# Altium PCB MB1364.PcbDoc (part 2 of 3)
Units mm, origin at the board's own origin, x right, y up, seen from the top; angles counter-clockwise.
Board outline 70 x 133.34 mm, 4 copper layers (Top Layer, Signal Layer 1, Signal Layer 3, Bottom Layer), stack 1.501 mm thick; 93 components, 195 nets, 473 pads, 282 vias.
Unrouted connection lines stored in the file: 23.
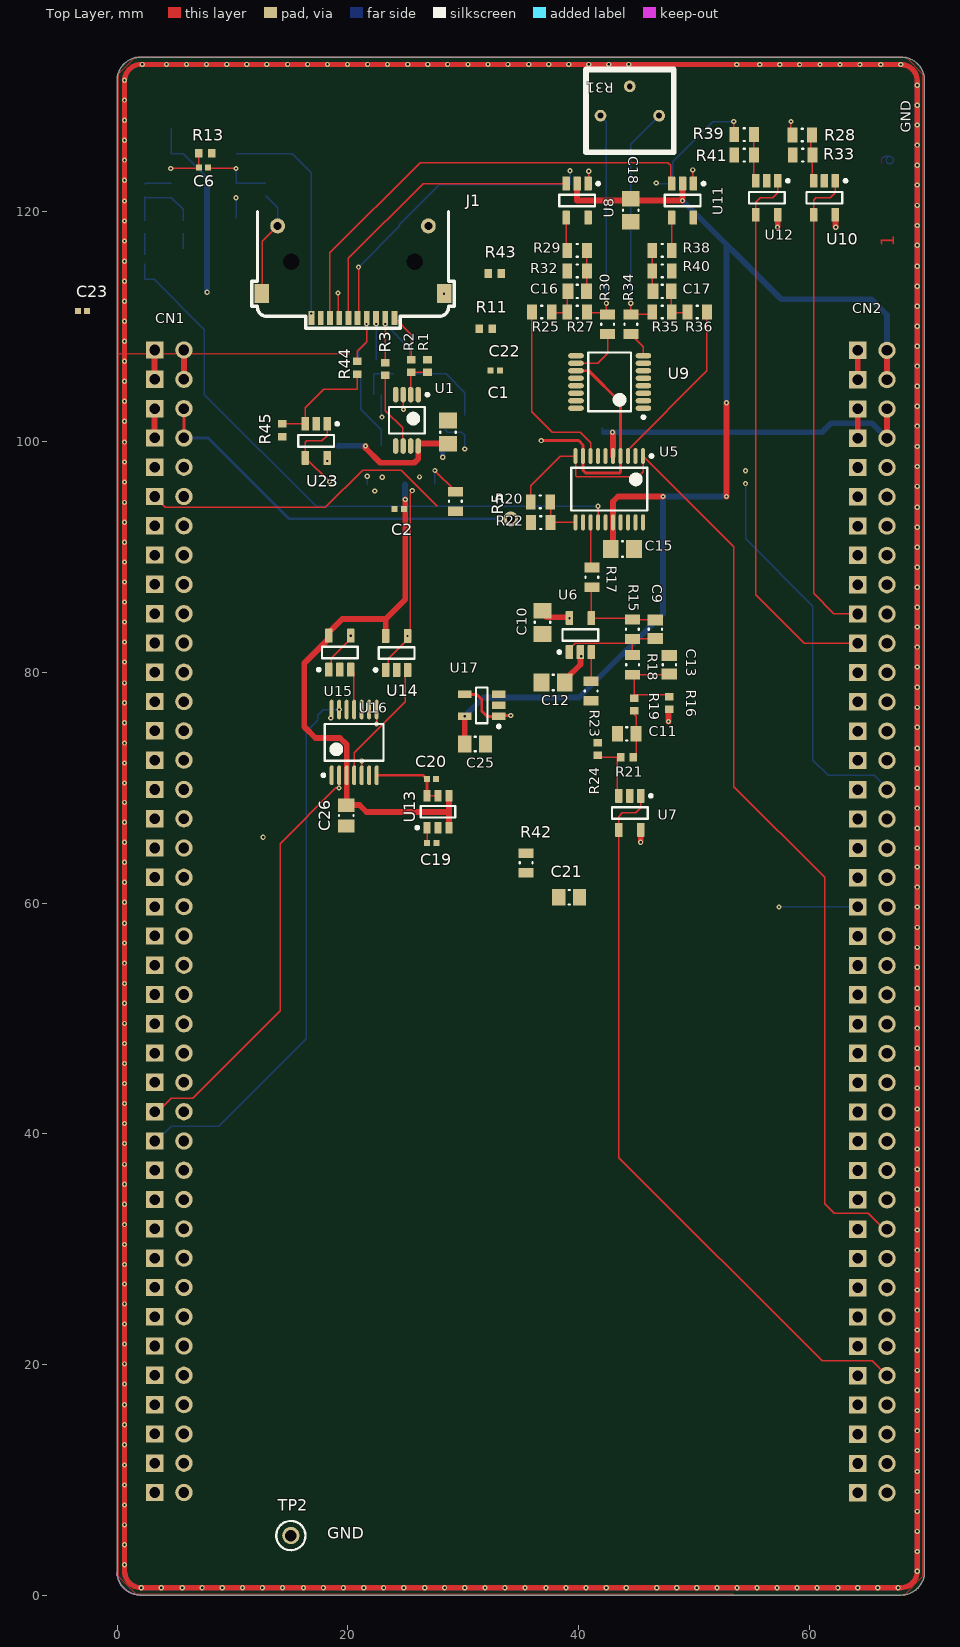
[diagram p0: Top Layer view]

## Part data (continued)
U2 U5: "IC SWITCH QUAD SPDT 20TSSOP", Case/Package=TSSOP, Dual Supply Voltage=15V, Manufacturer=Maxim, Manufacturer Part Number=MAX333AEUP+, Max Dual Supply Voltage=20V, Max Operating Temperature=85°C, Max Power Dissipation=559mW, Max Supply Current=250uA, Max Supply Voltage=30V, Min Dual Supply Voltage=4.5V, Min Operating Temperature=-40°C, Min Supply Voltage=10V, On-State Resistance=35R, Operating Supply Current=1uA, Package Quantity=74, Supplier Part Number 1=700-MAX333AEUP, ComponentLink1Description=https://datasheet.ciiva.com/2978/max333a-2978850.pdf, ComponentLink1URL=https://datasheet.ciiva.com/2978/max333a-2978850.pdf, ComponentLink2Description=https://datasheet.ciiva.com/30478/0900766b81253c85-30478260.pdf, ComponentLink2URL=https://datasheet.ciiva.com/30478/0900766b81253c85-30478260.pdf, ComponentLink3Description=https://datasheet.ciiva.com/1674/max333a-1674617.pdf, ComponentLink3URL=https://datasheet.ciiva.com/1674/max333a-1674617.pdf, ComponentLink4Description=https://datasheet.ciiva.com/26825/max333aeup-26825546.pdf, ComponentLink4URL=https://datasheet.ciiva.com/26825/max333aeup-26825546.pdf, Height=0.95mm, Lead Free="Lead Free", Length=6.6mm, Number of Bits=4, Number of Channels=4, Number of Pins=20, Packaging=Rail/Tube, Pricing 1="1=6.77, 10=6.43, 50=5.8, 100=5.8, 1000=5.62, 10000=5.62 (USD)", Radiation Hardening=No, REACH SVHC=Unknown, Stock 1=664, Supplier 1=Mouser, Supply Type=Single,Dual, Throw Configuration=SPDT, Turn-Off Delay Time=145ns, Turn-On Delay Time=175ns, Weight=0.006737oz, Width=4.5mm
U4: library part CMP-0055-00893-3, "CMOS Dual Operational Amplifier, 8-pin Narrow SOIC", Manufacturer="Texas Instruments", Package Reference=D0008A, PackageTopMarking=NSZXTT*LMC66*2CM, PowerWise=N, Code_IPC=SOIC127P600-8, Code_JEDEC=MS-012-AA, ComponentLink1Description="Datasheet URL", ComponentLink1URL=http://www.ti.com/general/docs/lit/getliterature.tsp?genericPartNumber=LMC662&fileType=pdf, CompType=Amplifiers, PackageDescription="SOIC Narrow, 4.9 x 3.9 x 1.45mm, 8 Lead, 1.27mm Pitch", PartId=1, PinCount=8, RoHS=N
U6 U7 U8 U10 U11 U12 U14 U15 U17 U22 U23: library part CMP-0809-00005-2, "Precision, Low Noise, Rail-to-Rail Output, Zero-Drift Operational Amplifier, 4 to 36 V, -40 to 125 degC, 5-pin SOT23 (DBV5), Green (RoHS & no Sb/Br)", Manufacturer="Texas Instruments", Rating=Catalog, Total Supply Voltage(Max)(+5V is 5, +/-5V is 10)=36, Total Supply Voltage(Min)(+5V is 5, +/-5V is 10)=4, CMRR(Min)(dB)=120, Code_JEDEC=MO-178, ComponentLink1Description="Manufacturer URL", ComponentLink1URL=http://www.ti.com/, ComponentLink2Description=Datasheet, ComponentLink2URL=http://www.ti.com/lit/ds/symlink/opa188.pdf, ComponentLink3Description="Package Specification", ComponentLink3URL=http://www.ti.com/litv/pdf/mpds018i, DatasheetVersion=SBOS642A, Eco-Plan="Green (RoHS & no Sb/Br)", GBW(Typ)(MHz)=2, Iq per channel(Max)(mA)=0.51, Mounting Technology="Surface Mount", Number of Channels=1, Offset Drift(Typ)(uV/C)=0.03, PackageDescription="5-Pin Plastic Small Outline, Body 1.6 x 2.9 mm, Pitch 0.95 mm", PackageReference=DBV0005A, PackageVersion="4073253-4/K, 03/2006", PartNumber=OPA188AIDBVR, Slew Rate(Typ)(V/us)=0.8, SubFamily="Zero Drift Precision Amplifier"
U13: "IC VREF SERIES 4.096V SOT23", Current - Supply=350µA, Manufacturer="Maxim Integrated", Operating Temperature="-40°C ~ 125°C (TA)", Package / Case=SOT-23-6, Supplier Part Number 1=MAX6070AAUT41+TCT-ND, Temperature Coefficient=6ppm/°C, Tolerance=±0.04%, Voltage - Input="4.3 V ~ 5.5 V", Voltage - Output (Min/Fixed)=4.096V, Category="Integrated Circuits (ICs)", ComponentLink1Description=https://datasheets.maximintegrated.com/en/ds/MAX6070-MAX6071.pdf, ComponentLink1URL=https://datasheets.maximintegrated.com/en/ds/MAX6070-MAX6071.pdf, Manufacturer Part Number=MAX6070AAUT41+T, Mounting Type="Surface Mount", Noise - 0.1Hz to 10Hz=9.6µVp-p, Noise - 10Hz to 10kHz=9µVrms, Output Type=Fixed, Packaging="Cut Tape (CT)", Part Status=Active, Pricing 1="1=3.41, 10=3.213, 25=2.5704, 50=2.4418, 100=2.2491, 250=2.13344, 500=2.05634 (USD)", Reference Type=Series, RoHS="RoHS Compliant", Stock 1=2623, Supplier 1=Digi-Key, Supplier Device Package=SOT-23-6
U16: library part CMP-0318-01541-2, "Quad 16-Bit Digital-to-Analog Converter with 5 ppm/degC On-Chip Reference, -40 to +105 degC, RU-14, Pb-Free, Tube", Generic Part Number=AD5666, Manufacturer="Analog Devices", # DAC Outputs=4, Code_JEDEC=MO-153-AB-1, ComponentLink1Description="Manufacturer URL", ComponentLink1URL=http://www.analog.com/en/index.html, ComponentLink2Description=Datasheet, ComponentLink2URL=http://www.analog.com/static/imported-files/data_sheets/AD5666.pdf, ComponentLink3Description="Package Specification", ComponentLink3URL=http://www.analog.com/static/imported-files/packages/36057385283879153717235186773RU14.pdf, ComponentLink4Description="Product URL", ComponentLink4URL=http://www.analog.com/en/digital-to-analog-converters/da-converters/ad5666/products/product.html, DatasheetVersion=Rev.D, Max V+=5.5V, Mounting Technology="Surface Mount", Op Pwr Diss=12.5mW, PackageDescription="14-Lead Thin Shrink Small Outline Package [TSSOP]", PackageReference=RU-14, PackageVersion=Aug-2002, Packing=Tube, PartNumber=AD5666BRUZ-2, Resolution (Bits)=16, RevisionNote="Component URL fixed", RoHS=Y, Settling Time=6µs, Single Supply=Yes

## Via types
v1: diameter 0.45, hole 0.2, Top Layer to Bottom Layer, tented both sides, 280 vias
v2: diameter 1.27, hole 0.711, Top Layer to Bottom Layer, 1 vias
v3: diameter 0.45, hole 0.2, Top Layer to Bottom Layer, 1 vias

## Nets (pads, with @x,y where several pads share a name; then routed paths per layer and width w, separated by ;. In a path a pad name is that pad's centre, name@x,y a point inside that pad or via, vN(x,y) a via of type N, cw(c..) or ccw(c..) an arc to the next point about the centre after c; other vN are vias at no path point)
3V3: CN1.24
3V3_VDD: CN1.13
5V: CN1.26
5V_EXT: CN1.14
5V_USB_STLK: CN2.16
+3.3: C22.2 C23.2 CN1.1 CN1.3 CN2.1 CN2.3 R42.2 U7.5 U10.5 U12.5 U22.5 U23.5 | length 158.6
  Top Layer w0.12: CN1.3@3.239,105.416 CN1.3@3.246,105.409 ; CN1.1@3.239,107.942 CN1.1@3.246,107.949
  Top Layer w0.5: CN1.3@3.239,105.416 CN1.1@3.239,107.942 ; v1@45.4,65.288 U7.5@45.4,66.343 ; v1@57.279,118.62 U12.5@57.279,119.674 ; v1@62.279,118.62 U10.5@62.279,119.674 ; CN2.3@64.206,105.384 CN2.1@64.206,107.924
  Signal Layer 1 w0.5: v1(18.212,98.323) 18.542,98.654 v1(28.224,98.654)
  Signal Layer 3 w0.12: CN1.1@3.246,107.949 4.182,108.885 8.014,108.885 10.3,106.599 17.641,106.599 20.74,103.5 28.969,103.5 33.821,98.649
  Signal Layer 3 w0.5: v1@28.231,98.654 56.109,98.654 57.252,99.797 ; v1(45.39,65.278) 49.86,65.278 57.252,72.669 57.252,99.797 ; v1(62.306,118.593) v1(57.252,118.593) 57.252,112.522 ; CN2.1@64.206,107.924 61.85,107.924 57.252,112.522 ; 57.252,99.797 57.252,112.522
  Bottom Layer w0.12: v1(28.224,98.654) v1@28.231,98.661
  Bottom Layer w0.5: v1@28.231,98.661 U22.5@28.231,99.363
+5: C2.2 C4.2 C10.1 C21.2 C26.2 CN1.5 CN1.7 CN2.5 CN2.7 R16.2 U2.16 U4.8 U6.5 U13.3 U13.4 U14.5 U15.5 U16.3 | length 136.1
  Top Layer w0.12: CN1.7@3.239,100.336 CN1.7@3.246,100.329 ; CN1.5@3.239,102.862 CN1.5@3.246,102.869 ; U15.5@18.354,83.187 U15.5@18.354,83.462 ; C26.2@19.863,68.489 C26.2@19.899,68.525 ; 47.803,76.417 R16.2@47.879,76.493
  Top Layer w0.25: C10.1@36.881,85.128 C10.1@37.231,84.778 ; U6.5@39.143,84.778 v1(39.215,84.706)
  Top Layer w0.5: CN1.7@3.239,100.336 CN1.5@3.239,102.862 ; U15.5@18.354,83.187 18.354,82.912 16.231,80.788 16.231,75.286 17.196,74.32 19.329,74.32 19.899,73.751 U16.3@19.899,71.078 C26.2@19.899,68.525 ; U15.5@18.354,83.462 19.515,84.623 23.282,84.623 ; C26.2@19.863,68.489 21.02,68.489 21.615,67.894 28.768,67.894 ; U14.5@23.282,83.161 23.282,84.623 ; v1(24.973,94.996) 24.973,86.314 23.282,84.623 ; U13.3@28.768,66.537 28.768,67.894 ; U13.4@28.768,69.287 28.768,67.894 ; C10.1@37.231,84.778 U6.5@39.143,84.778 ; v1(47.803,75.743) 47.803,76.417 ; CN2.7@64.206,100.304 CN2.5@64.206,102.844
  Signal Layer 1 w0.12: 10.058,101.625 10.287,101.397
  Signal Layer 1 w0.5: CN1.7@3.246,100.329 4.543,101.625 10.058,101.625 ; v1(10.297,121.158) 10.297,101.625 10.078,101.625 10.755,101.625 12.344,100.036 15.522,96.859 17.11,95.27 17.384,94.996 v1(24.973,94.996)
  Signal Layer 3 w0.5: v1(24.973,94.996) 28.925,94.996 v1(39.215,84.706) 47.803,76.118 v1(47.803,75.743)
  Bottom Layer w0.12: C4.2@10.306,119.38 10.306,121.146 U4.8@10.318,121.158 ; U2.16@24.942,96.296 U2.16@24.954,96.284
  Bottom Layer w0.28: v1@24.954,95.107 25.019,95.042 v1(24.973,94.996)
  Bottom Layer w0.5: v1@24.954,95.107 U2.16@24.954,96.284
+5R: CN1.6 CN1.8 U5.4 U5.9 U9.11 U17.1 U17.4 | length 84.5
  Top Layer w0.25: CN1.8@5.786,100.329 CN1.6@5.786,102.869 ; U17.4@30.14,78.09 31.181,78.09 31.615,77.656 31.615,76.64 32.065,76.19 U17.1@33.09,76.19 33.163,76.263 v1(34.13,76.263) ; v1(36.767,100.096) 40.016,100.096 40.397,99.715 U5.9@40.397,98.76 40.397,97.525 40.624,97.298 43.577,97.298 43.647,97.368 U5.4@43.647,98.76 43.637,98.77 43.637,103.384 43.647,103.394 40.885,106.156 U9.11@39.784,106.156
  Signal Layer 1 w0.25: v1(34.13,76.263) 34.13,96.08 36.767,98.718 v1(36.767,100.096)
  Bottom Layer w0.25: CN1.8@5.786,100.329 7.901,100.329 14.91,93.32 34.112,93.32 v2(34.138,93.294)
+5Ref: C20.2 U13.5 U13.6 U16.7 U17.3 | length 6.9
  Top Layer w0.12: U13.6@26.854,69.3 U13.6@26.868,69.287 U13.5@27.818,69.287
  Top Layer w0.25: U16.7@22.499,71.078 26.519,71.078 C20.2@26.854,70.742 U13.6@26.854,69.3
+12: C15.2 C18.2 C25.2 CN2.2 CN2.4 U5.16 U8.2 U11.2 U17.5 | length 109.3
  Top Layer w0.12: C25.2@30.14,73.797 C25.2@30.131,73.788 C25.2@30.35,73.568 ; C15.2@42.997,90.721 C15.2@43.015,90.703
  Top Layer w0.5: C25.2@30.14,73.797 v1(30.14,76.19) ; U8.2@39.878,122.379 39.878,120.904 v1(49.022,120.904) ; C15.2@42.997,90.721 U5.16@42.997,93.01 42.997,94.813 43.434,95.25 v1(47.32,95.25) ; 49.022,121.133 U11.2@49.022,122.379 ; v1(52.832,95.25) v1(52.832,103.378) ; CN2.4@66.746,105.384 CN2.2@66.746,107.924
  Signal Layer 3 w0.12: v1(49.022,120.904) 49.022,121.05 48.964,121.107 49.022,121.133
  Bottom Layer w0.5: v1(30.14,76.19) 31.775,77.826 40.056,77.826 47.32,85.09 v1(47.32,95.25) ; v1(47.32,95.25) v1(52.832,95.25) ; v1(49.022,120.904) 57.582,112.344 65.38,112.344 66.746,110.978 CN2.2@66.746,107.924 ; v1(52.832,103.378) 52.832,117.094
-5: C12.1 C14.2 CN2.6 CN2.8 U5.5 U6.2 | length 110.1
  Top Layer w0.12: C12.1@38.595,79.121 38.695,79.221 C12.1@38.971,79.497 ; v1@42.898,100.876 v1(42.947,100.826) v1@42.997,100.777
  Top Layer w0.5: C12.1@38.971,79.497 40.165,80.691 U6.2@40.165,81.407 ; U5.5@42.997,98.76 v1@42.997,100.777 ; CN2.8@66.746,100.304 CN2.6@66.746,102.844
  Signal Layer 1 w0.5: v1(40.234,81.407) 42.947,84.121 v1(42.947,100.826)
  Signal Layer 3 w0.5: v1(7.798,112.954) 12.421,108.331 26.873,108.331 34.378,100.826 v1(42.947,100.826)
  Bottom Layer w0.12: 4.718,127.127 4.668,127.077 4.668,124.968 5.715,124.968 7.798,122.885 ; 42.012,101.219 42.048,101.183 42.048,100.965
  Bottom Layer w0.5: v1(7.798,112.954) 7.798,122.885 ; 42.187,100.826 v1(42.947,100.826) 61.126,100.826 61.9,101.6 65.45,101.6 CN2.8@66.746,100.304
AGND: CN2.40
BEAM: C5.2 R12.1 U5.14 | length 53.5
  Top Layer w0.12: U5.14@41.697,93.01 v1(41.697,94.402)
  Bottom Layer w0.12: C5.2@2.413,115.424 R12.1@2.413,114.088 3.198,114.088 7.558,109.728 7.558,104.086 17.241,94.402 v1(41.697,94.402)
"Beam Sync Demod Out": C13.2 R16.1 R18.1 R19.2 | length 8.1
  Top Layer w0.12: R16.1@47.879,78.193 47.752,78.066 44.831,78.066 44.831,79.668 R18.1@44.704,79.795 47.829,79.795 C13.2@47.879,79.845
Beam_In: J1.10 R14.2 U4.5 | length 19.8
  Top Layer w0.12: J1.10@16.849,110.353 J1.10@16.849,110.728
  Bottom Layer w0.12: U4.5@10.318,124.968 15.189,124.968 16.84,123.317 v1(16.84,111.125)
Beam_mod: R17.2 U5.13 | length 3.7
  Top Layer w0.12: U5.13@41.148,92.71 41.047,92.609 41.047,89.199 R17.2@41.165,89.081
BOOT0: CN1.15
"Bottom Force Plate Force": J1.4 R7.2 R44.2 | length 7.3
  Top Layer w0.12: R44.2@20.807,107.001 20.807,107.823 21.649,108.665 J1.4@21.649,110.728
  Bottom Layer w0.12: R7.2@20.934,107.28 20.934,107.95 21.62,108.636 v1(21.62,110.211)
"Bottom Force Plate Sense": J1.3 R6.2 | length 3.1
  Bottom Layer w0.12: R6.2@22.458,107.103 v1(22.458,110.211)